# Altium PCB PCB_Reflow_Plate.PcbDoc (part 1 of 2)
Units mil, origin at the board's own origin, x right, y up, seen from the top; angles counter-clockwise.
Board outline 3822.83 x 3712.6 mil, 2 copper layers (Top Layer, Bottom Layer); 42 components, 17 nets, 157 pads, 47 vias.
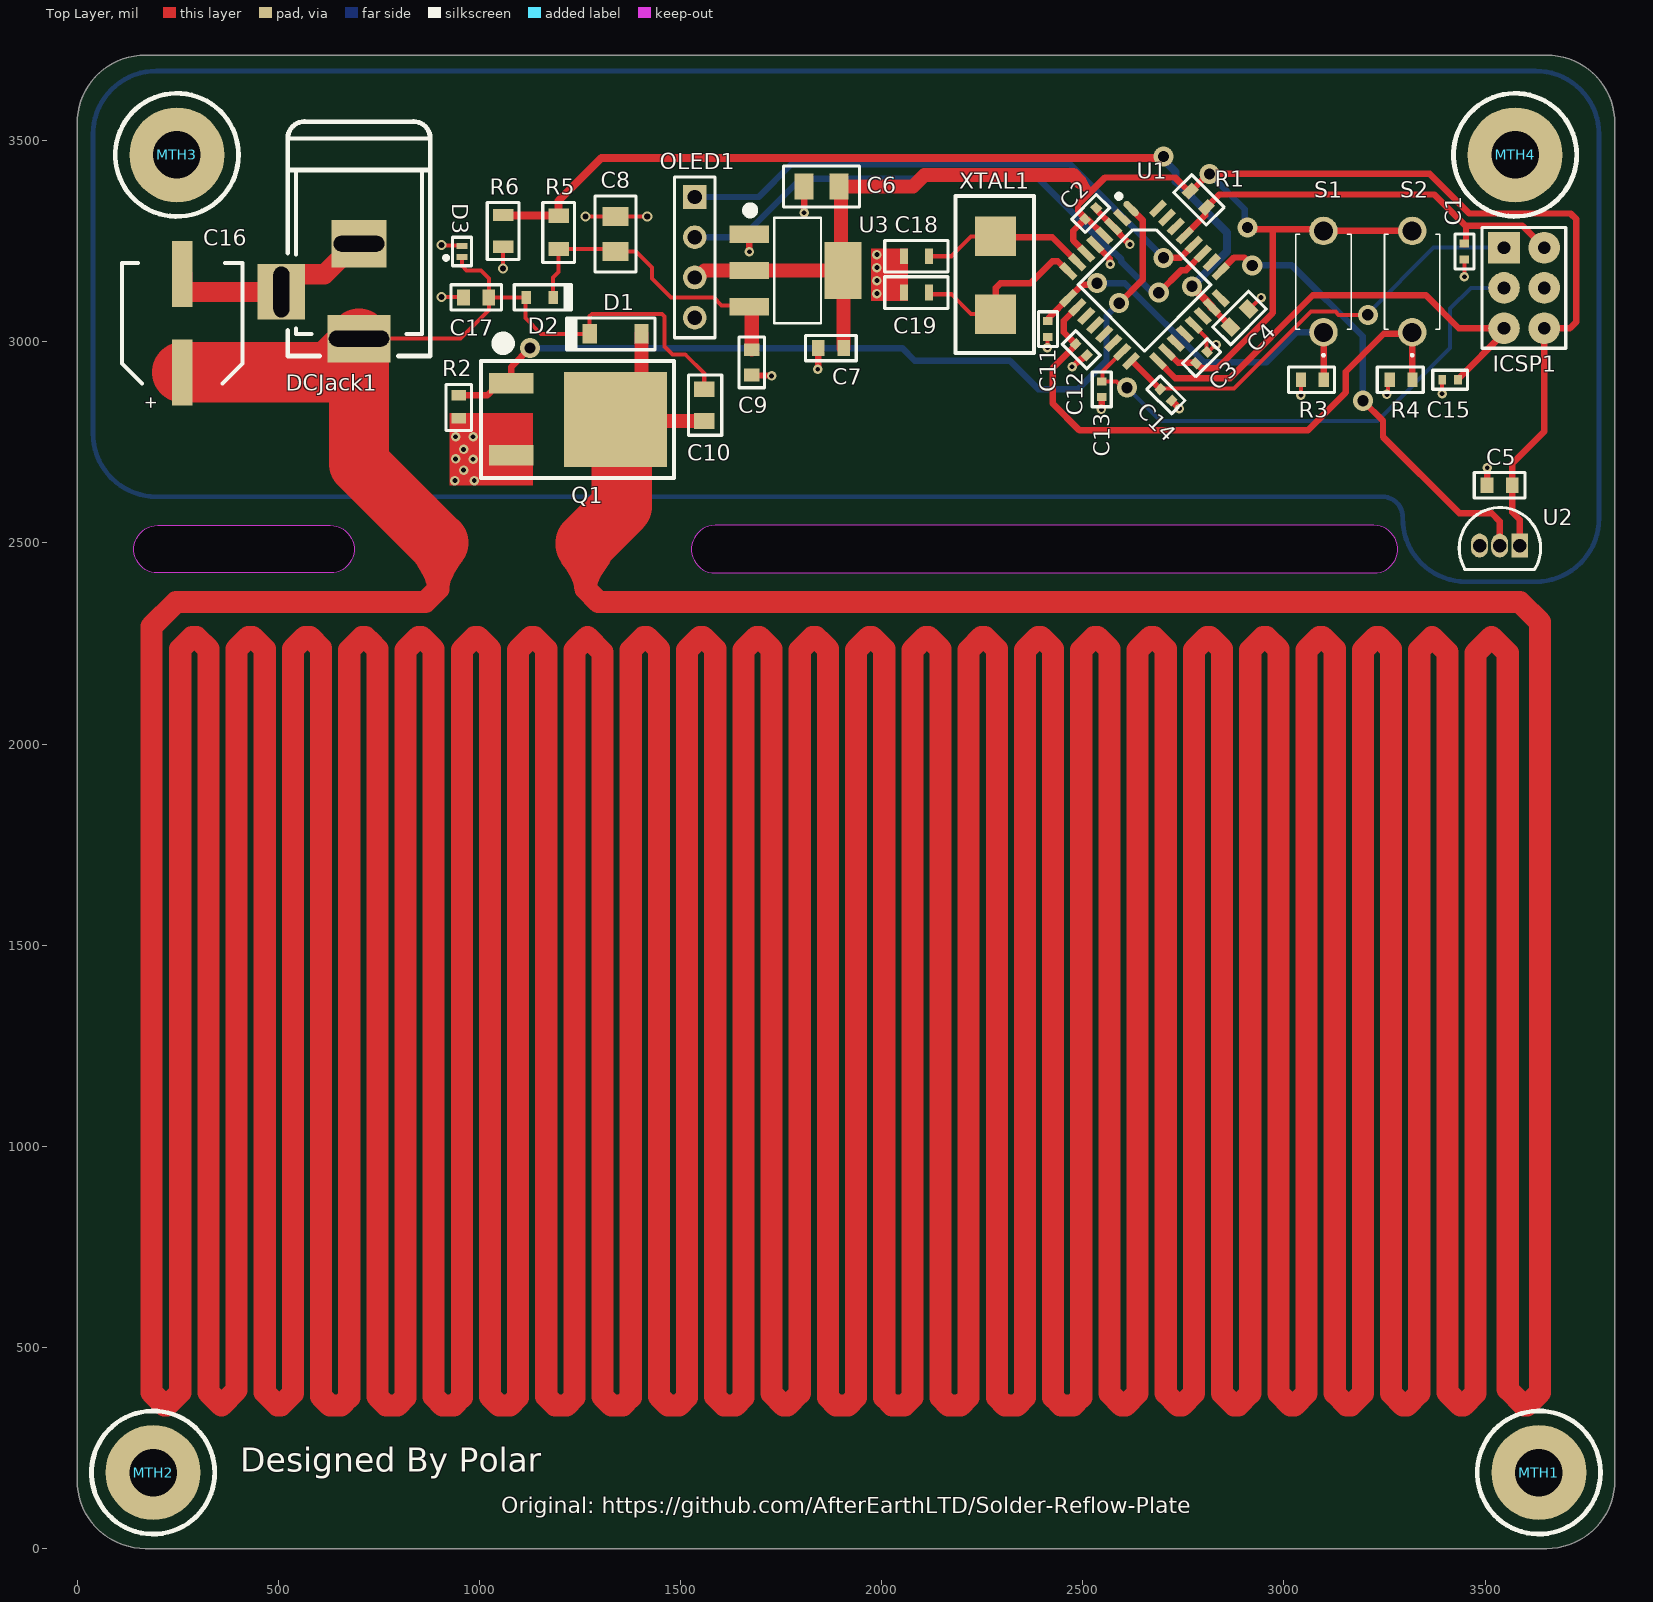
[diagram p0: Top Layer view]
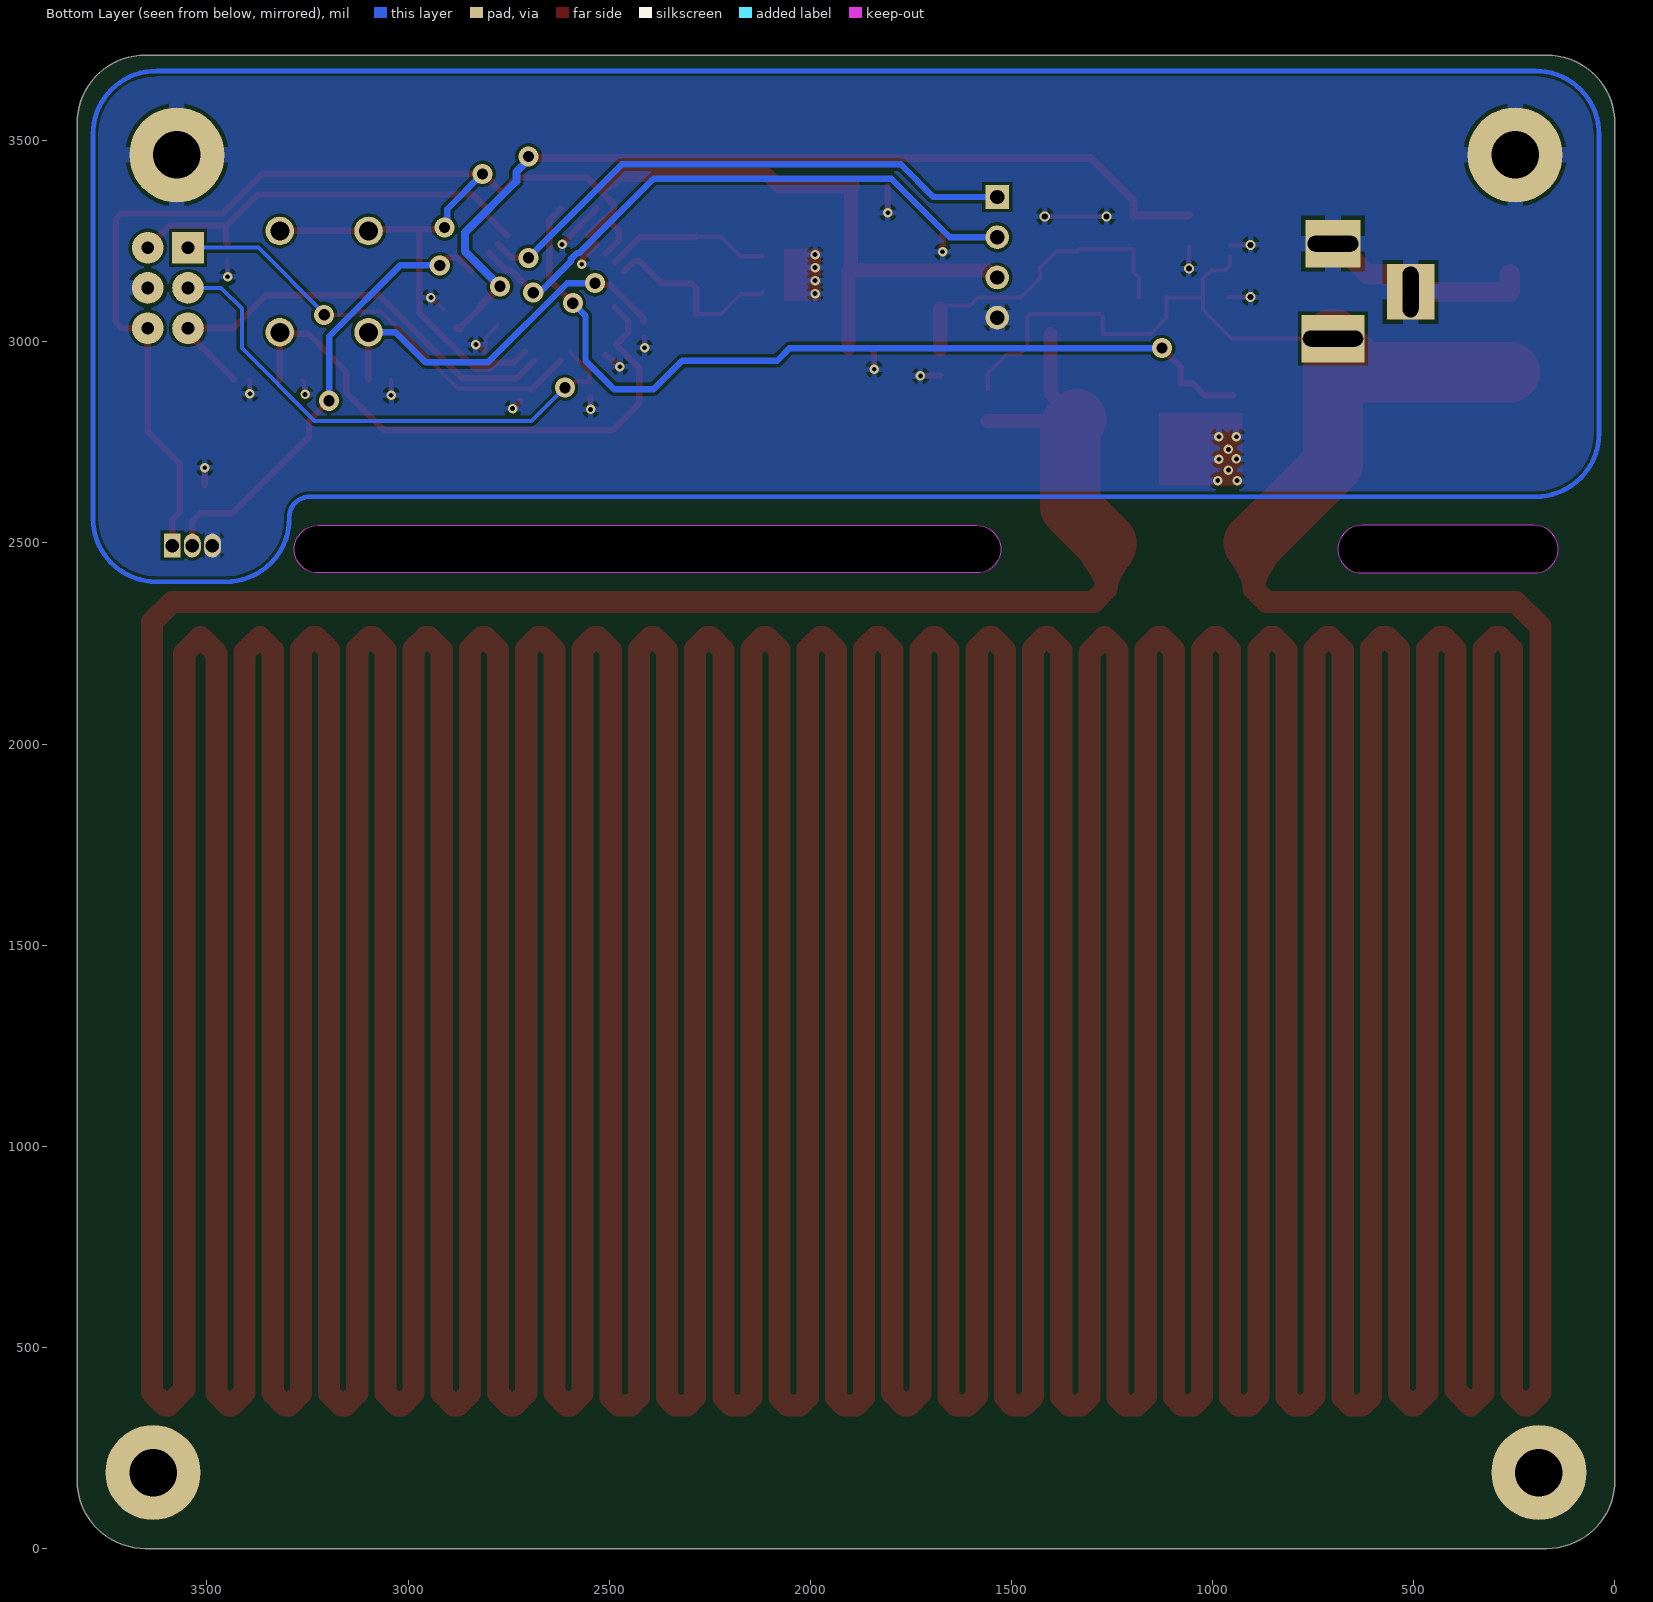
[diagram p1: Bottom Layer view, seen from below]
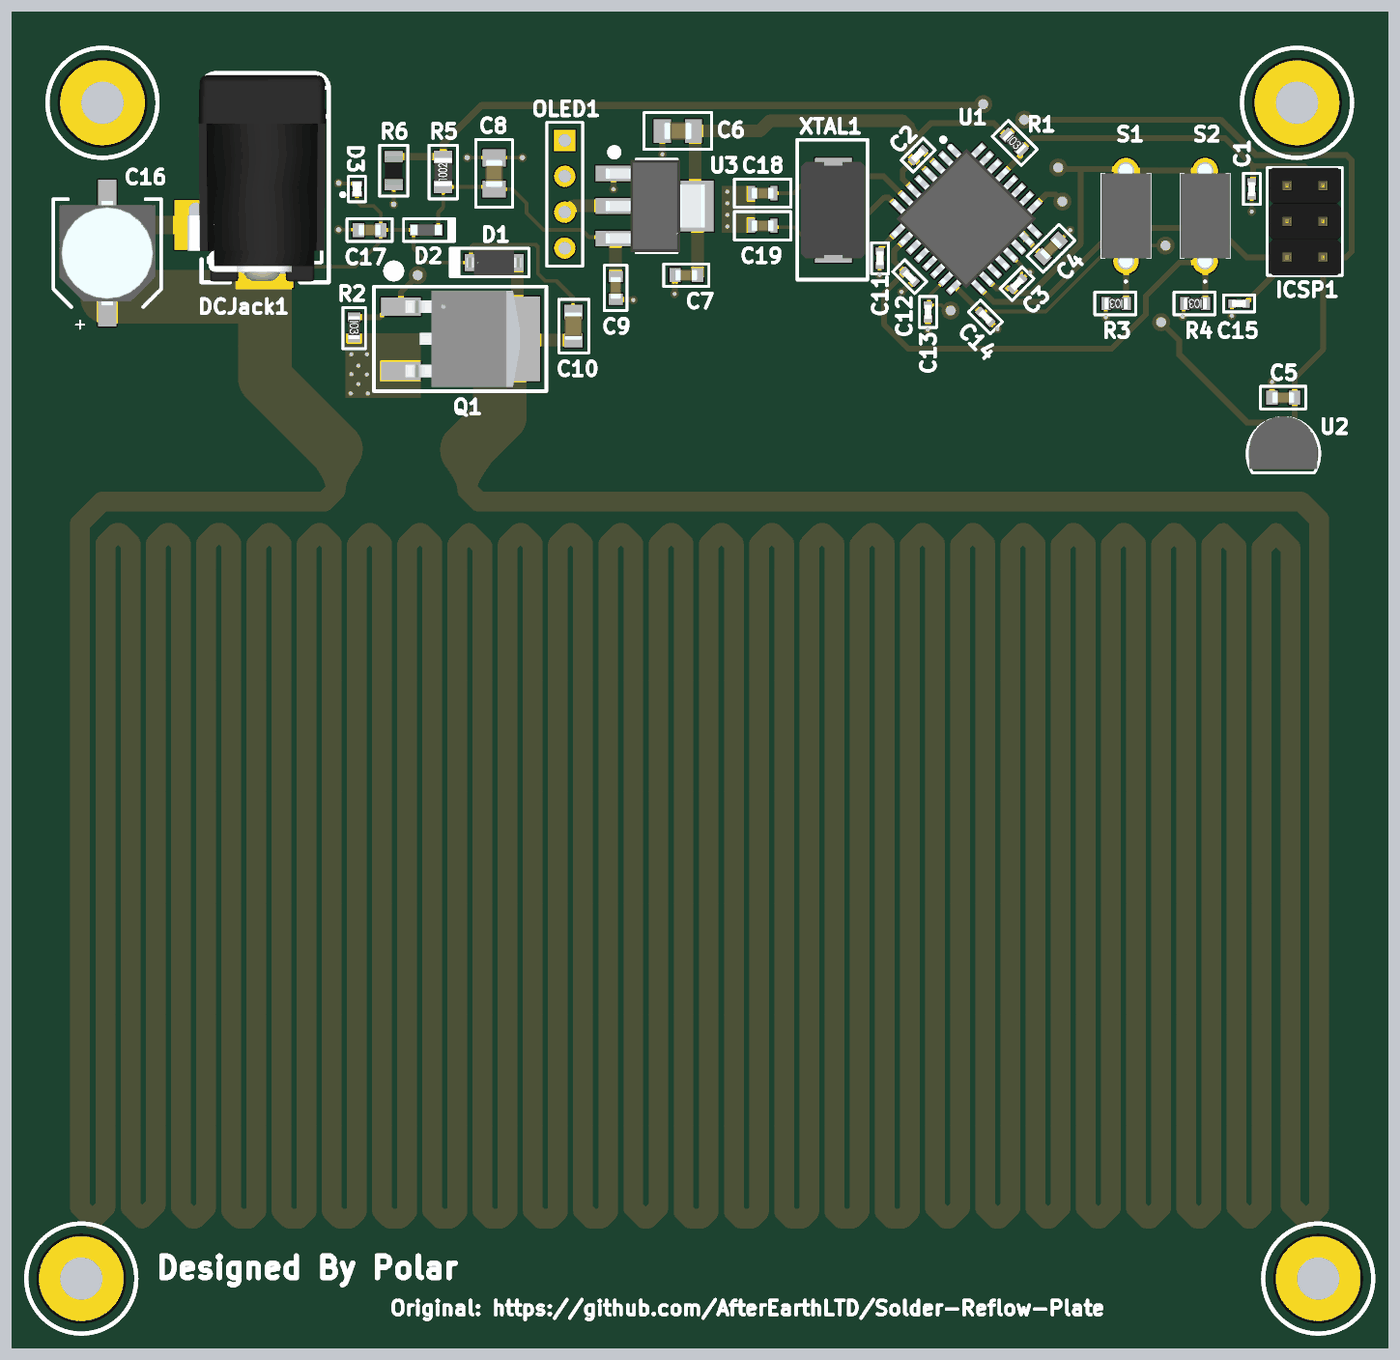
[diagram p2: 3D render of the assembled board from above, using the file's embedded part models]

## Layer stack, top to bottom
Top Solder: solder mask 0.4, Solder Resist, Dk 3.5
Top Layer: signal copper 1.4
Dielectric 1: dielectric 12.6, FR-4, Dk 4.8
Bottom Layer: signal copper 1.4
Bottom Solder: solder mask 0.4, Solder Resist, Dk 3.5

## Board outline
0,169.29 0,3543.31 cw(c169.29,3543.31) 169.29,3712.6 3653.54,3712.6 cw(c3653.54,3543.31) 3822.83,3543.31 3822.83,169.29 cw(c3653.54,169.29) 3653.54,0 169.29,0 cw(c169.29,169.29)
cut-out: 1586.14,2425.2 3223.93,2425.2 ccw(c3223.93,2484.25) 3223.93,2543.31 1586.14,2543.31 ccw(c1586.14,2484.25)
cut-out: 200.31,2425.2 cw(c200.31,2484.25) 200.31,2543.31 629.44,2543.31 cw(c629.44,2484.25) 629.44,2425.2

## Design rules (kind name [scope] priority, off if disabled: settings)
Clearance [All] p1: gap=7.5 ignorepadtopadclearanceinfootprint=FALSE except(8: Track-SMDPad Track-Via)
HoleSize [All] p1: absolutevalues=TRUE maxlimit=150 minlimit=1 maxpercent=80.000 minpercent=20.000
HoleToHoleClearance [All] p1: gap=16 allowstackedmicrovias=TRUE
MinimumSolderMaskSliver [All] p1: minsoldermaskwidth=3.5
PolygonConnect [All] p1: thpad.connectstyle=Relief thpad.reliefconductorwidth=40 thpad.reliefentries=4 thpad.polygonreliefangle="90 Angle" thpad.airgapwidth=10 smdpad.connectstyle=Relief smdpad.reliefconductorwidth=15 smdpad.reliefentries=4 smdpad.polygonreliefangle="90 Angle" smdpad.airgapwidth=10 via.connectstyle=Relief via.reliefconductorwidth=15 via.reliefentries=4 via.polygonreliefangle="90 Angle" via.airgapwidth=10
RoutingVias [All] p1: holewidth=15 width=30 viastyle="Through Hole" minholewidth=10 minwidth=20 maxholewidth=28 maxwidth=50
SilkToSilkClearance [All] p1: silktosilkclearance=8
SilkToSolderMaskClearance [IsPad] p1: minsilkscreentomaskgap=5.5 clearancetoexposedcopper=TRUE
SolderMaskExpansion [All] p1: expansion=4 istentingtop=FALSE
Width [All] p1: maxlimit=150 minlimit=10 preferedwidth=20
25 further rules are at their usual default settings.

## Components (designator, comment, footprint, x,y, rotation, side; value= is the part's Value field where it differs from the comment)
C1 "10n 0402" 0402B103J500CT 3448.82,3224.41 r90 top
C2 "10n 0402" 0402B103J500CT 2519.68,3318.9 r225 top
C3 "10n 0402" 0402B103J500CT 2795.28,2960.63 r45 top
C4 "100n 0603" 0603B104K250CT 2889.76,3059.05 r45 top
C5 "100n 0603" 0603B104K250CT 3536.38,2643.39 r180 top
C6 "22u 0805" CL21A226MAYNNNE 1850.39,3385.83 r180 top
C7 "100n 0603" 0603B104K250CT 1874.02,2984.25 r0 top
C8 "22u 0805" CL21A226MAYNNNE 1338.58,3267.72 r90 top
C9 "100n 0603" 0603B104K250CT 1677.17,2948.82 r90 top
C10 "1n 0805" FM21X102K501PXG 1559.06,2842.52 r90 top
C11 "10n 0402" 0402B103J500CT 2413.39,3031.5 r90 top
C12 "10n 0402" 0402B103J500CT 2496.06,2980.31 r135 top
C13 "10n 0402" 0402B103J500CT 2547.24,2881.89 r270 top
C14 "10n 0402" 0402B103J500CT 2706.83,2867.97 r135 top
C15 "10n 0402" 0402B103J500CT 3413.39,2905.51 r0 top
C16 "100u SMD Polarized" UWT1V101MCL1GS 261.28,3045.91 r90 top
C17 "100n 0603" 0603B104K250CT 992.13,3110.24 r0 top
C18 "16pf 0603 Capacitor" NMC0603NPO160J50TRPF 2086.61,3212.6 r0 top
C19 "16pf 0603 Capacitor" NMC0603NPO160J50TRPF 2086.61,3122.05 r0 top
D1 "Zener Diode" MMSZ24T1G 1338.58,3019.68 r180 top
D2 "Diode" 1N4448X-TP 1149.61,3110.24 r0 top
D3 "TVS bi-directional" PESD18VF1BLYL 956.69,3224.41 r90 top
DCJack1 "DCJack" KLDX-0202-B 677.08,3241.85 r270 top
ICSP1 "SL 22 112 06 G" "SL 22 112 06 G" 3547.24,3233.86 r0 top
MTH1 "Mounting Hole 6mm outer 3mm inner" MTH_6mmOD_3mmID 3633.86,188.98 r0 top
MTH2 "Mounting Hole 6mm outer 3mm inner" MTH_6mmOD_3mmID 188.98,188.98 r0 top
MTH3 "Mounting Hole 6mm outer 3mm inner" MTH_6mmOD_3mmID 248.03,3464.57 r0 top
MTH4 "Mounting Hole 6mm outer 3mm inner" MTH_6mmOD_3mmID 3574.8,3464.57 r0 top
OLED1 "Header 4" HDR1X4 1535.43,3359.84 r270 top
Q1 "Mosfet DPAK" AOD442 1208.66,2807.09 r270 top
R1 "10k 0603" RTT03103JTP 2787.4,3354.33 r135 top
R2 "10k 0603" RTT03103JTP 948.82,2838.58 r90 top
R3 "10k 0603" RTT03103JTP 3070.87,2905.51 r0 top
R4 "10k 0603" RTT03103JTP 3291.34,2905.51 r0 top
R5 "3k 0805" RTT05302JTP 1196.85,3271.65 r270 top
R6 "1k 0805" CR0805-FX-1001ELF 1059.06,3275.59 r90 top
S1 "PTS636_SP50_LFS" PTS636_SP50_LFS 3098.42,3023.62 r90 top
S2 "PTS636_SP50_LFS" PTS636_SP50_LFS 3318.9,3023.62 r90 top
U1 "ATMEGA328P-AU" ATMEGA328P-AU 2653.54,3141.73 r315 top
U2 "LMT85LP" LMT85LP 3536.38,2493.39 r0 top
U3 "AMS1117-5.0" AMS1117-5.0 1787.4,3177.17 r270 top
XTAL1 "16MHz Crystal" ABM7-16.000MHZ-D2Y-T 2283.46,3165.35 r270 top

## Footprints (in the part's own frame and the unit in brackets; to place one, negate y for a bottom-side part, rotate by r counter-clockwise, add the part's x,y. Pads: shape width x height; smd on the part's side, far side on the other; paste and mask are expansions set on the pad)
1N4448X-TP [mm]
  rect 0.6x0.8 smd: A(-0.85,0) K(0.85,0)
  silkscreen extent -1.6,-0.8 2,0.8, body extent -1.09,-0.4 1.09,0.4, height 0.76
0402B103J500CT [mm]
  rect 0.5x0.6 smd: 1(-0.5,0) 2(0.5,0)
  silkscreen extent -1.1,-0.6 1.1,0.6, body extent -0.5,-0.25 0.5,0.25, height 0.51
0603B104K250CT [mm]
  rect 0.8x1 smd: 1(-0.8,0) 2(0.8,0)
  silkscreen extent -1.6,-0.8 1.6,0.8, body extent -0.8,-0.4 0.8,0.4, height 0.87
ABM7-16.000MHZ-D2Y-T [mm]
  rect 2.5x2.6 smd: 1(-2.45,0) 2(2.45,0)
  silkscreen extent -4.99,-2.54 4.92,2.41, body extent -3.41,-2.29 3.41,2.29, height 1.41
AMS1117-5.0 [mm] "1A 70dB@(120Hz) 5mA 1.4V@1A -40?~+125?@(Tj) Fixed 5V~5V Positive 0.003%Vout 1 20V High-current SOT-223-3 Linear Voltage Regulators (LDO) ROHS"
  rect 1.1x2.5 smd: 1(-2.3,-2.97) 2(0,-2.97) 3(2.3,-2.97)
  rect 1.1x2.5 on Mech2: 1(-2.3,-2.97) 2(0,-2.97) 3(2.3,-2.97)
  rect 3.6x2.34 smd: 4(0,2.97)
  rect 3.6x2.34 on Mech2: 4(0,2.97)
  silkscreen extent -3.93,-3.03 3.33,1.57, body extent -3.25,-3.5 3.25,3.5, height 1.8
AOD442 [mm]
  rect 6x6.5 smd: 1(0,3.292)
  rect 1.3x2.8 smd: 2(2.273,-3.292) 3(-2.273,-3.292)
  silkscreen extent -5.16,-5.2 3.7,7, body extent -3.4,-2.97 3.4,5.11, height 2.45
ATMEGA328P-AU [mm]
  oval 1.2x0.45 smd: 1(-4,2.8)
  oval 1x0.45 on Mech2: 1(-4,2.8)
  rect 1.2x0.45 smd: 2(-4,2) 3(-4,1.2) 4(-4,0.4) 5(-4,-0.4) 6(-4,-1.2) 7(-4,-2) 8(-4,-2.8) 17(4,-2.8) 18(4,-2) 19(4,-1.2) 20(4,-0.4) 21(4,0.4) 22(4,1.2) 23(4,2) 24(4,2.8)
  rect 1x0.45 on Mech2: 2(-4,2) 3(-4,1.2) 4(-4,0.4) 5(-4,-0.4) 6(-4,-1.2) 7(-4,-2) 8(-4,-2.8) 17(4,-2.8) 18(4,-2) 19(4,-1.2) 20(4,-0.4) 21(4,0.4) 22(4,1.2) 23(4,2) 24(4,2.8)
  rect 0.45x1.2 smd: 9(-2.8,-4) 10(-2,-4) 11(-1.2,-4) 12(-0.4,-4) 13(0.4,-4) 14(1.2,-4) 15(2,-4) 16(2.8,-4) 25(2.8,4) 26(2,4) 27(1.2,4) 28(0.4,4) 29(-0.4,4) 30(-1.2,4) 31(-2,4) 32(-2.8,4)
  rect 0.45x1 on Mech2: 9(-2.8,-4) 10(-2,-4) 11(-1.2,-4) 12(-0.4,-4) 13(0.4,-4) 14(1.2,-4) 15(2,-4) 16(2.8,-4) 25(2.8,4) 26(2,4) 27(1.2,4) 28(0.4,4) 29(-0.4,4) 30(-1.2,4) 31(-2,4) 32(-2.8,4)
  silkscreen extent -5.24,-2.97 2.97,2.97, body extent -4.5,-4.5 4.5,4.5, height 1.2
CL21A226MAYNNNE [mm]
  rect 1.2x1.65 smd: 1(-1.1,0) 2(1.1,0)
  silkscreen extent -2.4,-1.3 2.4,1.3, body extent -1,-0.63 1,0.63, height 1.45
CR0805-FX-1001ELF [mm]
  rect 0.762x1.3 smd: 1(-1,0) 2(1,0)
  silkscreen extent -1.8,-1 1.8,1, body extent -1,-0.63 1,0.63, height 0.51
FM21X102K501PXG [mm]
  rect 1x1.3 smd: 1(-1,0) 2(1,0)
  silkscreen extent -1.9,-1.1 1.9,1, body extent -1,-0.63 1,0.63, height 1
HDR1X4 [mm] "Connector; Header; 4 Position"
  rect 1.5x1.5 hole 0.9: 1(0,0)
  round 1.5 hole 0.9: 2(2.54,0) 3(5.08,0) 4(7.62,0)
  silkscreen extent -1.27,-1.27 8.89,1.27
KLDX-0202-B [mm]
  rect 3x4 hole 1 slot 3.8 at 90 deg: P1(5.943,0.602)
  rect 3x3.5 hole 1 slot 3.2 at 90 deg: P2(-0.051,0.602)
  rect 3.5x3 hole 1 slot 3.2 at 0 deg: P3(2.997,-4.3)
  silkscreen extent -7.76,-3.9 7.04,5.1, body extent -7.62,-4.89 7,4.88, height 10.67
LMT85LP [mm]
  rect 1.07x1.5 hole 0.85 mask+0.003: 1(1.27,0)
  oval 1.07x1.5 hole 0.85 mask+0.003: 2(0,0) 3(-1.27,0)
  silkscreen extent -2.55,-1.52 2.59,2.4, body extent -2.41,-1.24 2.41,2.5, height 5.44
MMSZ24T1G [mm]
  rect 0.91x1.22 smd: A(-1.635,0) K(1.635,0)
  silkscreen extent -2.48,-1 3.1,1, body extent -1.93,-0.9 1.93,0.9, height 1.35
MTH_6mmOD_3mmID [mm] "mounting hole 6mm outer 3mm inner"
  round 6 hole 3 mask+0.178: 1(0,0)
  silkscreen extent -3.89,-3.89 3.89,3.89
NMC0603NPO160J50TRPF [mm]
  rect 0.5x1 smd: 1(-0.8,0) 2(0.8,0)
  silkscreen extent -2,-1 2,1, body extent -0.8,-0.4 0.8,0.4, height 0.87
PESD18VF1BLYL [mm]
  rect 0.4x0.7 smd: 1(-0.35,0) 2(0.35,0)
  silkscreen extent -0.9,-0.6 0.9,1.1, body extent -0.5,-0.3 0.5,0.3, height 0.48
PTS636_SP50_LFS [mm] "Switch"
  round 1.8 hole 1.2: 1(0,0) 2(6.4,0)
  silkscreen extent -1.5,-1.75 6.2,1.75, body extent -0.5,-1.75 6.9,1.75, height 4.6
RTT03103JTP [mm]
  rect 0.65x0.9 smd: 1(-0.725,0) 2(0.725,0)
  silkscreen extent -1.5,-0.8 1.4,0.8, body extent -0.8,-0.4 0.8,0.4, height 0.46
RTT05302JTP [mm]
  rect 0.9x1.3 smd: 1(-1.05,0) 2(1.05,0)
  silkscreen extent -1.9,-1 1.9,1, body extent -1,-0.63 1,0.63, height 0.51
"SL 22 112 06 G" [mm]
  rect 2x2 hole 0.8: 1(0,0)
  round 2 hole 0.8: 2(0,-2.54) 3(0,-5.08) 4(2.54,-5.08) 5(2.54,-2.54) 6(2.54,0)
  silkscreen extent -1.4,-6.35 3.9,1.27, body extent -1.27,-6.35 3.81,1.27, height 8.65
UWT1V101MCL1GS [mil]
  rect 164x50 smd: 1(-122,0) 2(122,0)
  silkscreen extent -150,-150 150,150, body extent -146,-134 146,134, height 315

## Part data
C1 C2 C3 C11 C12 C13 C14 C15: library part C1005X7S2A103M050BB, "Cap Ceramic 0.01uF 100V X7S 20% SMD 0402 125C Paper T/R", Capacitance=10nF, Case Code (Imperial)=0402, Case Code (Metric)=1005, Dielectric=X7S, Manufacturer=TDK, Max Operating Temperature=125°C, Min Operating Temperature=-55°C, Package Quantity=1, Resistor Type=Ceramic, Tolerance=20%, Voltage Rating=100V, Case/Package=0402, Category="Ceramic Capacitors", ComponentLink1Description=https://datasheet.ciiva.com/24217/c1005x7s2a103m050bb-264489-24217683.pdf?src-supplier=Mouser, ComponentLink1URL=https://datasheet.ciiva.com/24217/c1005x7s2a103m050bb-264489-24217683.pdf?src-supplier=Mouser, Depth=0.5mm, Lead Free="Lead Free", Length=1mm, Manufacturer Part Number=C1005X7S2A103M050BB, Mount="Surface Mount", Number of Pins=2, Packaging="Tape and Reel", Pricing 1="1=0.15740, 10=0.11320, 25=0.08760, 50=0.06570, 100=0.05460, 250=0.05380, 500=0.03850, 1000=0.03230, 3000=0.02830, 6000=0.02780 (USD)", RoHS=Yes, RoHS Compliant=Yes, Series=C, Stock 1=12146, Supplier 1="Arrow Electronics", Supplier Part Number 1=C1005X7S2A103M050BB, Termination=SMD/SMT, Thickness=0.022inch, Voltage Rating (DC)=100V, Weight=2.3E-05oz, Width=0.5mm
C4 C5 C7 C9 C17: library part GRM188R72A104KA35D, "CAP CER 0.1UF 100V X7R 0603", Capacitance=100nF, Case Code (Imperial)=0603, Case Code (Metric)=1608, Dielectric=X7R, Manufacturer=Murata, Max Operating Temperature=125°C, Min Operating Temperature=-55°C, Package Quantity=1, Tolerance=10%, Voltage=100V, Case/Package=0603, Category="Ceramic Capacitors", ComponentLink1Description=https://datasheet.ciiva.com/22703/1747473-22703345.pdf?src-supplier=Element14, ComponentLink1URL=https://datasheet.ciiva.com/22703/1747473-22703345.pdf?src-supplier=Element14, ComponentLink2Description=https://datasheet.ciiva.com/34302/1857815-34302863.pdf?src-supplier=Jameco, ComponentLink2URL=https://datasheet.ciiva.com/34302/1857815-34302863.pdf?src-supplier=Jameco, ComponentLink3Description=https://datasheet.ciiva.com/11787/0900766b80ef921d-11787064.pdf?src-supplier=RSComponents, ComponentLink3URL=https://datasheet.ciiva.com/11787/0900766b80ef921d-11787064.pdf?src-supplier=RSComponents, ComponentLink4Description=https://datasheet.ciiva.com/18100/getdatasheetpartid-27818-18100710.pdf?src-supplier=Verical, ComponentLink4URL=https://datasheet.ciiva.com/18100/getdatasheetpartid-27818-18100710.pdf?src-supplier=Verical, ComponentLink5Description=https://datasheet.ciiva.com/29201/451984-da-01-en-vs-kondensator-0603-29201725.pdf?src-supplier=Conrad, ComponentLink5URL=https://datasheet.ciiva.com/29201/451984-da-01-en-vs-kondensator-0603-29201725.pdf?src-supplier=Conrad, ComponentLink6Description=https://datasheet.ciiva.com/7937/1747473-7937676.pdf?src-supplier=Element14, ComponentLink6URL=https://datasheet.ciiva.com/7937/1747473-7937676.pdf?src-supplier=Element14, ComponentLink7Description=https://datasheet.ciiva.com/135/partnumbering-e-01-135140.pdf?src-supplier=Digi-Key, ComponentLink7URL=https://datasheet.ciiva.com/135/partnumbering-e-01-135140.pdf?src-supplier=Digi-Key, ComponentLink8Description=https://datasheet.ciiva.com/135/partnumbering-e-01-135139.pdf?src-supplier=Digi-Key, ComponentLink8URL=https://datasheet.ciiva.com/135/partnumbering-e-01-135139.pdf?src-supplier=Digi-Key, ComponentLink9Description=https://datasheet.ciiva.com/135/partnumbering-e-01-135141.pdf?src-supplier=Digi-Key, ComponentLink9URL=https://datasheet.ciiva.com/135/partnumbering-e-01-135141.pdf?src-supplier=Digi-Key, ComponentLink10Description=https://datasheet.ciiva.com/16382/product-16382965.pdf?src-supplier=Future+Electronics, ComponentLink10URL=https://datasheet.ciiva.com/16382/product-16382965.pdf?src-supplier=Future+Electronics, Construction=Flat, Depth=0.8mm, Height=0.8mm, Lead Free="Lead Free", Length=1.6mm, Manufacturer Part Number=GRM188R72A104KA35D, Material=Ceramic, Mount="Surface Mount", Packaging="Tape and Reel", Pricing 1="4000=0.04400 (USD)", Radiation Hardening=No, REACH SVHC="No SVHC", RoHS=Yes, RoHS Compliant=Yes, Series=GRM, Size=0.8mm, Stock 1=360000, Supplier 1="Arrow Electronics", Supplier Part Number 1=GRM188R72A104KA35D, Termination=SMD/SMT, Thickness=0.035inch, Voltage Rating=100V, Voltage Rating (DC)=100V, Weight=0.000222oz, Width=0.8mm
C6 C8: library part CL21A226MAYNNNE, "25V 22uF X5R ±20% 0805 Multilayer Ceramic Capacitors MLCC - SMD/SMT ROHS", Capacitance=22u, Manufacturer=Samsung, Supplier Part Number 1=C602037, Category="Ceramic Capacitors", Manufacturer Part Number=CL21A226MAYNNNE, Pricing 1="20=0.01460, 200=0.01420, 600=0.01420, 2000=0.01420, 10000=0.01420, 20000=0.01420 (USD)", RoHS=Yes, RoHS Compliant=Yes, Stock 1=9380620, Supplier 1=LCSC
C10: library part GRM21AR72E102KW01D, "0805 1 nF 250 V ±10% Tolerance X7R SMT Multilayer Ceramic Capacitor", Capacitance=1n, Case Code (Imperial)=0805, Case Code (Metric)=2012, Dielectric=X7R, Manufacturer=Murata, Max Operating Temperature=125°C, Min Operating Temperature=-55°C, Package Quantity=4000, Tolerance=10%, Voltage=250V, Case/Package=0805, Category="Ceramic Capacitors", ComponentLink1Description=https://datasheet.ciiva.com/3778/12716grm21ar72e102kw0123-3778089.pdf?src-supplier=Arrow+Electronics, ComponentLink1URL=https://datasheet.ciiva.com/3778/12716grm21ar72e102kw0123-3778089.pdf?src-supplier=Arrow+Electronics, ComponentLink2Description=https://datasheet.ciiva.com/134/partnumbering-e-01-134212.pdf?src-supplier=Digi-Key, ComponentLink2URL=https://datasheet.ciiva.com/134/partnumbering-e-01-134212.pdf?src-supplier=Digi-Key, ComponentLink3Description=https://datasheet.ciiva.com/134/partnumbering-e-01-134213.pdf?src-supplier=Digi-Key, ComponentLink3URL=https://datasheet.ciiva.com/134/partnumbering-e-01-134213.pdf?src-supplier=Digi-Key, ComponentLink4Description=https://datasheet.ciiva.com/134/partnumbering-e-01-134214.pdf?src-supplier=Digi-Key, ComponentLink4URL=https://datasheet.ciiva.com/134/partnumbering-e-01-134214.pdf?src-supplier=Digi-Key, Construction=Flat, Depth=1.25mm, Height=1mm, Lead Free="Lead Free", Length=2mm, Manufacturer Part Number=GRM21AR72E102KW01D, Material=Ceramic, Mount="Surface Mount", Packaging="Tape and Reel", Pricing 1="4000=0.07440, 8000=0.06810, 12000=0.06640, 28000=0.06360, 100000=0.05520 (USD)", Radiation Hardening=No, RoHS=Yes, RoHS Compliant=Yes, Series=GRM, Stock 1=28000, Supplier 1="Arrow Electronics", Supplier Part Number 1=GRM21AR72E102KW01D, Termination=SMD/SMT, Thickness=0.039inch, Voltage Rating=250V, Voltage Rating (DC)=250V, Width=1.25mm
C16: library part UWT1V101MCL1GS, "-45℃~+105℃ 1000hrs@105℃ 100uF 7.7mm 35V 6.3mm ±20% SMD,D6.3xL7.7mm Aluminum Electrolytic Capacitors - SMD ROHS", Capacitance=100uF, Case/Package=Radial, Dielectric Material=Aluminium, Leakage Current=3uA, Manufacturer=Nichicon, Max Operating Temperature=105°C, Min Operating Temperature=-55°C, Package Quantity=900, Ripple Current=84mA, Supplier Part Number 1=C125975, Tolerance=20%, Voltage=35V, Category="Aluminum Electrolytic Capacitors", ComponentLink1Description=https://datasheet.ciiva.com/96/e-wt-96660.pdf?src-supplier=Digi-Key, ComponentLink1URL=https://datasheet.ciiva.com/96/e-wt-96660.pdf?src-supplier=Digi-Key, ComponentLink2Description=https://datasheet.ciiva.com/96/e-wt-96659.pdf?src-supplier=Digi-Key, ComponentLink2URL=https://datasheet.ciiva.com/96/e-wt-96659.pdf?src-supplier=Digi-Key, ComponentLink3Description=https://datasheet.ciiva.com/96/e-wt-96661.pdf?src-supplier=Digi-Key, ComponentLink3URL=https://datasheet.ciiva.com/96/e-wt-96661.pdf?src-supplier=Digi-Key, ComponentLink4Description=https://datasheet.ciiva.com/11778/0900766b80fa3a91-11778473.pdf?src-supplier=RSComponents, ComponentLink4URL=https://datasheet.ciiva.com/11778/0900766b80fa3a91-11778473.pdf?src-supplier=RSComponents, ComponentLink5Description=https://datasheet.ciiva.com/11687/e-wt-11687372.pdf?src-supplier=Avnet, ComponentLink5URL=https://datasheet.ciiva.com/11687/e-wt-11687372.pdf?src-supplier=Avnet, ComponentLink6Description=https://datasheet.ciiva.com/16294/e-wt-16294316.pdf?src-supplier=Future+Electronics, ComponentLink6URL=https://datasheet.ciiva.com/16294/e-wt-16294316.pdf?src-supplier=Future+Electronics, ComponentLink7Description=https://datasheet.ciiva.com/15199/getdatasheetpartid-450031-15199274.pdf?src-supplier=Verical, ComponentLink7URL=https://datasheet.ciiva.com/15199/getdatasheetpartid-450031-15199274.pdf?src-supplier=Verical, Construction=Cylindrical, Diameter=6.3mm, Dissipation Factor=0.14%, Height=7.7mm, Height - Seated (Max)=0.303inch, Lead Diameter=0.8mm, Lead Free="Lead Free", Lead Pitch=2.2mm, Length=7.7mm, Life (Hours)=1000Hour, Manufacturer Part Number=UWT1V101MCL1GS, Mount="Surface Mount,PCB", Number of Pins=2, Packaging="Tape and Reel", Pricing 1="5=0.08560, 50=0.06960, 150=0.06140, 500=0.05460, 2500=0.05220, 5000=0.05060 (USD)", Radiation Hardening=No, REACH SVHC="No SVHC", Ripple Current (AC)=84mA, RoHS=Yes, RoHS Compliant=Yes, Series=WT, Stock 1=986890, Supplier 1=LCSC, Termination=SMD/SMT, Voltage Rating=35V, Voltage Rating (DC)=35V
C18 C19: library part NMC0603NPO160J50TRPF, "Cap Ceramic 16pF 50V C0G 5% SMD 0603 125°C Paper T/R", Capacitance=16pF, Case/Package=0603, Dielectric=C0G, Manufacturer="NIC Components", Max Operating Temperature=125°C, Min Operating Temperature=-55°C, Tolerance=5%, Category="Ceramic Capacitors", ComponentLink1Description=https://datasheet.ciiva.com/11602/nmc1-11602959.pdf?src-supplier=Avnet, ComponentLink1URL=https://datasheet.ciiva.com/11602/nmc1-11602959.pdf?src-supplier=Avnet, Construction=Flat, Depth=0.8mm, Length=1.6mm, Manufacturer Part Number=NMC0603NPO160J50TRPF, Mount="Surface Mount", Packaging="Tape and Reel", Pricing 1="1=0.00630, 10=0.00560, 25=0.00470 (USD)", Radiation Hardening=No, RoHS=Yes, RoHS Compliant=Yes, Stock 1=3200, Supplier 1="Arrow Electronics", Supplier Part Number 1=NMC0603NPO160J50TRPF
D1: library part MMSZ24T1G, "Zener Single Diode, 24 V, 500 mW, SOD-123, 5 %, 2, 150 C RoHS Compliant: Yes", Case/Package=SOD-123-2, Forward Voltage=900mV, Manufacturer="ON Semiconductor", Max Operating Temperature=150°C, Max Power Dissipation=500mW, Max Reverse Current=50nA, Min Operating Temperature=-55°C, Package Quantity=1, Test Current=5mA, Tolerance=5%, Voltage Rating (DC)=24V, Zener Current=10mA, Category="Zener Diodes", ComponentLink1Description=https://datasheet.ciiva.com/15142/getdatasheetpartid-53226-15142109.pdf?src-supplier=Verical, ComponentLink1URL=https://datasheet.ciiva.com/15142/getdatasheetpartid-53226-15142109.pdf?src-supplier=Verical, ComponentLink2Description=https://datasheet.ciiva.com/895/mmsz2v4t1-d-895073.pdf?src-supplier=Digi-Key, ComponentLink2URL=https://datasheet.ciiva.com/895/mmsz2v4t1-d-895073.pdf?src-supplier=Digi-Key, ComponentLink3Description=https://datasheet.ciiva.com/895/mmsz2v4t1-d-895074.pdf?src-supplier=Digi-Key, ComponentLink3URL=https://datasheet.ciiva.com/895/mmsz2v4t1-d-895074.pdf?src-supplier=Digi-Key, ComponentLink4Description=https://datasheet.ciiva.com/895/mmsz2v4t1-d-895075.pdf?src-supplier=Digi-Key, ComponentLink4URL=https://datasheet.ciiva.com/895/mmsz2v4t1-d-895075.pdf?src-supplier=Digi-Key, ComponentLink5Description=https://datasheet.ciiva.com/16396/mmsz2v4t1-d-16396045.pdf?src-supplier=Future+Electronics, ComponentLink5URL=https://datasheet.ciiva.com/16396/mmsz2v4t1-d-16396045.pdf?src-supplier=Future+Electronics, Contact Plating=Tin,Matte, Element Configuration=Single, ESD Protection=Yes, Height=1.25mm, Impedance=70R, Lead Free="Lead Free", Length=2.84mm, Manufacturer Part Number=MMSZ24T1G, Max Reverse Leakage Current=50nA, Number of Pins=2, Packaging="Tape and Reel", Power Dissipation=500mW, Power Rating=500mW, Pricing 1="1=0.22650, 10=0.18600, 25=0.17690, 100=0.10080, 250=0.09980, 500=0.07220, 1000=0.05330, 3000=0.04250, 6000=0.03220, 15000=0.02660, 30000=0.02630, 75000=0.02610 (USD)", Radiation Hardening=No, REACH SVHC="No SVHC", RoHS=Yes, Stock 1=86820, Supplier 1="Arrow Electronics", Supplier Part Number 1=MMSZ24T1G, Voltage Tolerance=5%, Width=1.8mm, Working Voltage=24V, Zener Voltage=24V
D2: library part 1N4448X-TP, "1N4448X Series 4 A 75 V 150 mW Surface Mount Switching Diode - SOD-523", Average Rectified Current=250mA, Capacitance=4pF, Current Rating=150mA, Forward Current=500mA, Forward Voltage=1.25V, Manufacturer=MCC, Max Operating Temperature=150°C, Max Repetitive Reverse Voltage (Vrrm)=75V, Max Reverse Leakage Current=2.5uA, Max Surge Current=4A, Min Operating Temperature=-65°C, Package Quantity=1, Power Dissipation=150mW, Category="Rectifier Diodes", ComponentLink1Description=https://datasheet.ciiva.com/916/1n4448xsod-523-916912.pdf?src-supplier=Digi-Key, ComponentLink1URL=https://datasheet.ciiva.com/916/1n4448xsod-523-916912.pdf?src-supplier=Digi-Key, ComponentLink2Description=https://datasheet.ciiva.com/16836/1n4448xsod-523-16836341.pdf?src-supplier=Future+Electronics, ComponentLink2URL=https://datasheet.ciiva.com/16836/1n4448xsod-523-16836341.pdf?src-supplier=Future+Electronics, Element Configuration=Single, Lead Free="Lead Free", Manufacturer Part Number=1N4448X-TP, Max Reverse Voltage (DC)=75V, Mount="Surface Mount", Number of Pins=2, Output Current=500mA, Packaging="Tape and Reel", Peak Non-Repetitive Surge Current=4A, Polarity=Standard, Pricing 1="8000=0.03630, 24000=0.03380, 48000=0.02910 (USD)", Recovery Time=4ns, Reverse Recovery Time=4ns, RoHS=Yes, Stock 1=216000, Supplier 1="Arrow Electronics", Supplier Part Number 1=1N4448X-TP, Voltage Rating (DC)=75V
D3: library part PESD18VF1BLYL, "TVS DIODE 18VWM 17VC SOD882", Manufacturer=Nexperia, Category="ESD and Circuit Protection ICs", ComponentLink1Description=http://www.farnell.com/datasheets/1738914.pdf?src-supplier=Farnell, ComponentLink1URL=http://www.farnell.com/datasheets/1738914.pdf?src-supplier=Farnell, ComponentLink2Description=http://www.farnell.com/datasheets/1738914.pdf?src-supplier=Newark, ComponentLink2URL=http://www.farnell.com/datasheets/1738914.pdf?src-supplier=Newark, ComponentLink3Description=https://assets.nexperia.com/documents/data-sheet/PESD18VF1BL.pdf?src-supplier=Digi-Key, ComponentLink3URL=https://assets.nexperia.com/documents/data-sheet/PESD18VF1BL.pdf?src-supplier=Digi-Key, Manufacturer Part Number=PESD18VF1BLYL, Pricing 1="1=0.35670, 10=0.07470, 25=0.07380, 100=0.07320, 250=0.06160, 500=0.06100, 1000=0.05850, 3000=0.05790, 6000=0.05730 (USD)", RoHS=Yes, RoHS Compliant=Yes, Stock 1=6792, Supplier 1="Arrow Electronics", Supplier Part Number 1=PESD18VF1BLYL
DCJack1: library part KLDX-0202-B, "Conn Power PIN 2 POS Solder RA Thru-Hole 3 Terminal 1 Port", Color=Black, Current Rating=3.5A, Flammability Rating="UL94 V-0", Insulation Resistance=100MR, Manufacturer=Kycon, Max Operating Temperature=85°C, Min Operating Temperature=-25°C, Package Quantity=500, Supplier Part Number 1=2092-KLDX-0202-B-ND, Voltage Rating=24V, Category="Power Connectors", ComponentLink1Description=https://datasheet.ciiva.com/4561/kldx-0202-x-184473-4561491.pdf?src-supplier=Mouser, ComponentLink1URL=https://datasheet.ciiva.com/4561/kldx-0202-x-184473-4561491.pdf?src-supplier=Mouser, Connector Type=Power, Contact Gender=Female, Contact Material=Brass, Contact Plating=Tin, Gender=Female, Housing Material=PBT, Manufacturer Part Number=KLDX-0202-B, Mount="Through Hole", Number of Contacts=2, Orientation="Right Angle", Packaging=Bag, Pricing 1="1=0.74000, 10=0.62400, 25=0.59800, 50=0.58540, 100=0.55990, 250=0.50904, 500=0.45814, 1000=0.40723, 2500=0.36906 (USD)", RoHS=Yes, Stock 1=90692, Supplier 1=Digi-Key, Termination=Solder, Voltage Rating (DC)=24V
ICSP1: "Conn Unshrouded Header M 6 POS 2.54mm Solder ST Thru-Hole", Manufacturer="Fischer Elektronik", Max Current Rating=3A, Max Operating Temperature=163°C, Max Voltage Rating (AC)=250V, Min Operating Temperature=-40°C, Category="Headers and Wire Housings", ComponentLink1Description=https://datasheet.ciiva.com/26853/getdatasheetpartid-646250-26853533.pdf?src-supplier=Verical, ComponentLink1URL=https://datasheet.ciiva.com/26853/getdatasheetpartid-646250-26853533.pdf?src-supplier=Verical, Contact Material=Bronze, Contact Plating=Gold, Depth=5mm, Gender=Male, Housing Material=Polyamide, Length=15.24mm, Manufacturer Part Number="SL 22 112 06 G", Number of Rows=2, Orientation=Straight, Pitch=2.54mm, Pricing 1="1=0.53140, 25=0.53130, 50=0.53120, 100=0.53110 (USD)", RoHS=Yes, Stock 1=6120, Supplier 1="Arrow Electronics", Supplier Part Number 1="SL 22 112 06 G", Termination=Solder
MTH1 MTH2 MTH3 MTH4: library part MTH_6mmOD_3mmID, "Mounting Hole 6mm outer 3mm inner drill"
OLED1: "Header, 4-Pin", LatestRevisionDate=17-Jul-2002, LatestRevisionNote="Re-released for DXP Platform.", Publisher="Altium Limited"
Q1: library part AOD442, "Trans MOSFET N-CH 60V 37A 3-Pin(2+Tab) DPAK", Case/Package=DPAK, Continuous Drain Current (ID)=37A, Drain to Source Voltage (Vdss)=60V, Gate to Source Voltage (Vgs)=20V, Input Capacitance=2.3nF, Manufacturer="Alpha & Omega Semiconductor", Max Operating Temperature=175°C, Max Power Dissipation=2.1W, Min Operating Temperature=-55°C, Power Dissipation=60W, Supplier Part Number 1=C87617, Category=MOSFETs, ComponentLink1Description=https://datasheet.ciiva.com/6384/aod442-6384657.pdf?src-supplier=Digi-Key, ComponentLink1URL=https://datasheet.ciiva.com/6384/aod442-6384657.pdf?src-supplier=Digi-Key, ComponentLink2Description=https://datasheet.ciiva.com/6384/aod442-6384651.pdf?src-supplier=Digi-Key, ComponentLink2URL=https://datasheet.ciiva.com/6384/aod442-6384651.pdf?src-supplier=Digi-Key, ComponentLink3Description=https://datasheet.ciiva.com/6384/aod442-6384654.pdf?src-supplier=Digi-Key, ComponentLink3URL=https://datasheet.ciiva.com/6384/aod442-6384654.pdf?src-supplier=Digi-Key, Lead Free="Lead Free", Manufacturer Part Number=AOD442, Mount="Surface Mount", Number of Elements=1, Number of Pins=3, Packaging="Tape and Reel", Pricing 1="1=0.66730, 10=0.54640, 30=0.48690, 100=0.42740, 500=0.39140, 1000=0.37330 (USD)", Radiation Hardening=No, Rds On Max=20mR, RoHS=Yes, Stock 1=14654, Supplier 1=LCSC
R1 R2 R3 R4: library part RT0603DRE0710KL, "Res Thin Film 0603 10K Ohm 0.5% 0.1W(1/10W) ±50ppm/°C Pad SMD T/R", Case Code (Imperial)=0603, Case Code (Metric)=1608, Manufacturer=Yageo, Max Operating Temperature=125°C, Max Power Dissipation=100mW, Min Operating Temperature=-55°C, Package Quantity=5000, Resistance=10k, Resistor Type="Thin Film", Temperature Coefficient=50ppm/°C, Tolerance=0.5%, Voltage Rating=75V, Voltage Rating (DC)=50V, Case/Package=0603, Category="Chip SMD Resistors", ComponentLink1Description=https://datasheet.ciiva.com/2565/pyu-rt-1-to-0-05-rohs-l-5-2565939.pdf?src-supplier=Digi-Key, ComponentLink1URL=https://datasheet.ciiva.com/2565/pyu-rt-1-to-0-05-rohs-l-5-2565939.pdf?src-supplier=Digi-Key, Construction=Rectangular, Depth=0.8mm, Features="Moisture Resistant", Height=0.022inch, Lead Free="Lead Free", Length=0.063inch, Manufacturer Part Number=RT0603DRE0710KL, Military Standard=Not, Number of Terminations=2, Packaging="Tape and Reel", Power Rating=100mW, Pricing 1="1=0.09190, 10=0.07850, 25=0.04030, 100=0.02970, 250=0.01780, 500=0.01770, 1000=0.01580, 3000=0.01220 (USD)", RoHS=Yes, RoHS Compliant=Yes, Series=RT, Size Code=0603, Stock 1=4505, Supplier 1="Arrow Electronics", Supplier Part Number 1=RT0603DRE0710KL, Termination=SMD/SMT, Width=0.031inch
R5: library part RC0805FR-073KL, "Res Thick Film 0805 3K Ohm 1% 0.125W(1/8W) ±100ppm/C Pad SMD T/R", Case Code (Imperial)=0805, Case Code (Metric)=2012, Manufacturer=Yageo, Max Operating Temperature=155°C, Max Power Dissipation=125mW, Min Operating Temperature=-55°C, Package Quantity=1, Resistance=3k, Resistor Type="Thick Film", Temperature Coefficient=100ppm/°C, Tolerance=1%, Voltage Rating=150V, Case/Package=0805, Category="Chip SMD Resistors", ComponentLink1Description=https://datasheet.ciiva.com/2457/pyu-r-int-thick-7-2457135.pdf?src-supplier=Digi-Key, ComponentLink1URL=https://datasheet.ciiva.com/2457/pyu-r-int-thick-7-2457135.pdf?src-supplier=Digi-Key, ComponentLink2Description=https://datasheet.ciiva.com/2457/pyu-r-int-thick-7-2457136.pdf?src-supplier=Digi-Key, ComponentLink2URL=https://datasheet.ciiva.com/2457/pyu-r-int-thick-7-2457136.pdf?src-supplier=Digi-Key, ComponentLink3Description=https://datasheet.ciiva.com/2457/pyu-r-int-thick-7-2457134.pdf?src-supplier=Digi-Key, ComponentLink3URL=https://datasheet.ciiva.com/2457/pyu-r-int-thick-7-2457134.pdf?src-supplier=Digi-Key, ComponentLink4Description=https://datasheet.ciiva.com/5558/rc0805-5558124.pdf?src-supplier=Mouser, ComponentLink4URL=https://datasheet.ciiva.com/5558/rc0805-5558124.pdf?src-supplier=Mouser, ComponentLink5Description=https://datasheet.ciiva.com/17043/rc0805-17043750.pdf?src-supplier=Future+Electronics, ComponentLink5URL=https://datasheet.ciiva.com/17043/rc0805-17043750.pdf?src-supplier=Future+Electronics, Construction=Rectangular, Depth=1.25mm, Features="Moisture Resistant", Height=0.024inch, Lead Free="Lead Free", Length=2mm, Manufacturer Part Number=RC0805FR-073KL, Military Standard=Not, Mount="Surface Mount", Number of Terminations=2, Packaging="Tape and Reel", Power Rating=125mW, Pricing 1="5000=0.00470 (USD)", RoHS=Yes, RoHS Compliant=Yes, Series=RC, Size Code=0805, Stock 1=75000, Supplier 1="Arrow Electronics", Supplier Part Number 1=RC0805FR-073KL, Termination=SMD/SMT, Voltage Rating (DC)=150V, Width=0.049inch
R6: library part CR0805-FX-1001ELF, "125mW ±100ppm/℃ ±1% 1kΩ 0805 Chip Resistor - Surface Mount ROHS", Case Code (Imperial)=0805, Case Code (Metric)=2012, Manufacturer=Bourns, Max Operating Temperature=155°C, Max Power Dissipation=125mW, Min Operating Temperature=-55°C, Package Quantity=1, Resistance=1k, Resistance Tolerance=1%, Resistor Type="Thick Film", Temperature Coefficient=100ppm/°C, Voltage Rating=150V, Case/Package=0805, Category="Chip SMD Resistors", ComponentLink1Description=https://datasheet.ciiva.com/11810/0900766b80fcdb72-11810305.pdf?src-supplier=RSComponents, ComponentLink1URL=https://datasheet.ciiva.com/11810/0900766b80fcdb72-11810305.pdf?src-supplier=RSComponents, ComponentLink2Description=https://datasheet.ciiva.com/27049/775383-27049976.pdf?src-supplier=Jameco, ComponentLink2URL=https://datasheet.ciiva.com/27049/775383-27049976.pdf?src-supplier=Jameco, ComponentLink3Description=https://datasheet.ciiva.com/16722/70154685-16722677.pdf?src-supplier=Allied+Electronics, ComponentLink3URL=https://datasheet.ciiva.com/16722/70154685-16722677.pdf?src-supplier=Allied+Electronics, ComponentLink4Description=https://datasheet.ciiva.com/9123/chpreztr-9123643.pdf?src-supplier=Avnet, ComponentLink4URL=https://datasheet.ciiva.com/9123/chpreztr-9123643.pdf?src-supplier=Avnet, ComponentLink5Description=https://datasheet.ciiva.com/6547/chpreztr-6547421.pdf?src-supplier=Digi-Key, ComponentLink5URL=https://datasheet.ciiva.com/6547/chpreztr-6547421.pdf?src-supplier=Digi-Key, ComponentLink6Description=https://datasheet.ciiva.com/30129/159chpreztr-30129981.pdf?src-supplier=Onlinecomponents.com, ComponentLink6URL=https://datasheet.ciiva.com/30129/159chpreztr-30129981.pdf?src-supplier=Onlinecomponents.com, ComponentLink7Description=https://datasheet.ciiva.com/6547/chpreztr-6547422.pdf?src-supplier=Digi-Key, ComponentLink7URL=https://datasheet.ciiva.com/6547/chpreztr-6547422.pdf?src-supplier=Digi-Key, ComponentLink8Description=https://datasheet.ciiva.com/46394/691949-46394380.pdf?src-supplier=Element14, ComponentLink8URL=https://datasheet.ciiva.com/46394/691949-46394380.pdf?src-supplier=Element14, ComponentLink9Description=https://datasheet.ciiva.com/7986/1856384-7986222.pdf?src-supplier=Element14, ComponentLink9URL=https://datasheet.ciiva.com/7986/1856384-7986222.pdf?src-supplier=Element14, ComponentLink10Description=https://datasheet.ciiva.com/6547/chpreztr-6547423.pdf?src-supplier=Digi-Key, ComponentLink10URL=https://datasheet.ciiva.com/6547/chpreztr-6547423.pdf?src-supplier=Digi-Key, ComponentLink11Description=https://datasheet.ciiva.com/48692/001055506-da-01-en-smd-wid-cr0805-fx-1001elf-1k-ohm-1-8w-48692106.pdf?src-supplier=Conrad, ComponentLink11URL=https://datasheet.ciiva.com/48692/001055506-da-01-en-smd-wid-cr0805-fx-1001elf-1k-ohm-1-8w-48692106.pdf?src-supplier=Conrad, Contact Plating=Tin, Depth=1.25mm, Features="Moisture Resistant", Height=0.5mm, Length=2mm, Manufacturer Part Number=CR0805-FX-1001ELF, Mount="Surface Mount", Number of Pins=2, Number of Terminations=2, Packaging="Tape and Reel", Power Rating=125mW, Pricing 1="100000=0.00430 (USD)", Radiation Hardening=No, REACH SVHC="No SVHC", RoHS=Yes, RoHS Compliant=Yes, Series=CR0805, Stock 1=100000, Supplier 1="Arrow Electronics", Supplier Part Number 1=CR0805-FX-1001ELF, Technology="THICK FILM", Termination=SMD/SMT, Thickness=508um, Tolerance=1%, Voltage Rating (DC)=150V, Width=1.25mm
S1 S2: "Switch", Manufacturer="C & K COMPONENTS", Manufacturer Part Number="PTS636 SP50 LFS", Arrow Price/Stock=https://www.arrow.com/en/products/pts636-sp50-lfs/ck, Datasheet Link=https://www.ckswitches.com/media/2779/pts636.pdf, Height=4.5mm, Supplier 1="Arrow Electronics", Supplier Part Number 1="PTS636 SP50 LFS"
U1: "2KB 16K@x16bit -40℃~+85℃ 1.8V~5.5V AVR 1@x8ch/10bit Internal oscillator included 20MHz 23 1KB TQFP-32_7x7x08P Microcontroller Units (MCUs/MPUs/SOCs) ROHS", Case/Package=TQFP, Manufacturer=Microchip, Supplier Part Number 1=C14877, Category=Microcontrollers, ComponentLink1Description=http://www.farnell.com/datasheets/2047852.pdf?src-supplier=Farnell, ComponentLink1URL=http://www.farnell.com/datasheets/2047852.pdf?src-supplier=Farnell, ComponentLink2Description=https://4donline.ihs.com/images/VipMasterIC/IC/ATML/ATML-S-A0002642585/ATML-S-A0002642585-1.pdf?hkey=6D3A4C79FDBF58556ACFDE234799DDF0&src-supplier=Farnell, ComponentLink2URL=https://4donline.ihs.com/images/VipMasterIC/IC/ATML/ATML-S-A0002642585/ATML-S-A0002642585-1.pdf?hkey=6D3A4C79FDBF58556ACFDE234799DDF0&src-supplier=Farnell, ComponentLink3Description=https://4donline.ihs.com/images/VipMasterIC/IC/ATML/ATML-S-A0002642585/ATML-S-A0002642585-1.pdf?src-supplier=Element14, ComponentLink3URL=https://4donline.ihs.com/images/VipMasterIC/IC/ATML/ATML-S-A0002642585/ATML-S-A0002642585-1.pdf?src-supplier=Element14, ComponentLink4Description=http://www.farnell.com/datasheets/798182.pdf?src-supplier=Newark, ComponentLink4URL=http://www.farnell.com/datasheets/798182.pdf?src-supplier=Newark, ComponentLink5Description=http://www.microchip.com/mymicrochip/filehandler.aspx?ddocname=en589968&src-supplier=Digi-Key, ComponentLink5URL=http://www.microchip.com/mymicrochip/filehandler.aspx?ddocname=en589968&src-supplier=Digi-Key, Manufacturer Part Number=ATMEGA328P-AU, Pricing 1="1=4.54970, 10=4.01960, 30=3.74910, 100=3.38840, 500=3.25860, 1000=3.20270 (USD)", RoHS=Yes, RoHS Compliant=Yes, Stock 1=9922, Supplier 1=LCSC
U2: "1.8V-Capable, 10 uA Analog Output Temperature Sensor in SC70 and TO-92 3-TO-92 -50 to 150", Case/Package=TO-226-3, Manufacturer="Texas Instruments", Max Operating Temperature=150°C, Max Supply Voltage=5.5V, Min Operating Temperature=-50°C, Min Supply Voltage=1.8V, Category="Integrated Circuits (ICs)", ComponentLink1Description=http://components.arrow.com/part/dataview/66446727S843532N7713?src-supplier=Arrow+Electronics, ComponentLink1URL=http://components.arrow.com/part/dataview/66446727S843532N7713?src-supplier=Arrow+Electronics, ComponentLink2Description=http://www.ti.com/general/docs/lit/getliterature.tsp?genericPartNumber=LMT85&fileType=pdf&src-supplier=Farnell, ComponentLink2URL=http://www.ti.com/general/docs/lit/getliterature.tsp?genericPartNumber=LMT85&fileType=pdf&src-supplier=Farnell, ComponentLink3Description=http://www.farnell.com/datasheets/2001682.pdf?src-supplier=Element14, ComponentLink3URL=http://www.farnell.com/datasheets/2001682.pdf?src-supplier=Element14, ComponentLink4Description=http://www.ti.com/general/docs/suppproductinfo.tsp?distId=10&amp;gotoUrl=http%3A%2F%2Fwww.ti.com%2Flit%2Fgpn%2Flmt85&src-supplier=Digi-Key, ComponentLink4URL=http://www.ti.com/general/docs/suppproductinfo.tsp?distId=10&amp;gotoUrl=http%3A%2F%2Fwww.ti.com%2Flit%2Fgpn%2Flmt85&src-supplier=Digi-Key, ComponentLink5Description=http://www.ti.com/lit/gpn/lmt85?src-supplier=Mouser, ComponentLink5URL=http://www.ti.com/lit/gpn/lmt85?src-supplier=Mouser, ComponentLink6Description=http://www.ti.com/general/docs/lit/getliterature.tsp?genericPartNumber=LMT85-Q1&&fileType=pdf&src-supplier=Avnet, ComponentLink6URL=http://www.ti.com/general/docs/lit/getliterature.tsp?genericPartNumber=LMT85-Q1&&fileType=pdf&src-supplier=Avnet, Interface=Analog, Lead Free="Lead Free", Manufacturer Part Number=LMT85LP, Mount="Through Hole", Number of Pins=3, Output Type="Analog Voltage,Analog", Packaging=Bulk, Pricing 1="1=1.02040, 10=0.74280, 25=0.73520, 100=0.53290, 250=0.52760, 500=0.50920, 1000=0.49080 (USD)", REACH SVHC="No SVHC", RoHS=Yes, RoHS Compliant=Yes, Stock 1=1882, Supplier 1="Arrow Electronics", Supplier Part Number 1=LMT85LP
U3: "1A 70dB@(120Hz) 5mA 1.4V@1A -40℃~+125℃@(Tj) Fixed 5V~5V Positive 0.003%Vout 1 20V High-current SOT-223-3 Linear Voltage Regulators (LDO) ROHS", Manufacturer=WPMtek, Supplier Part Number 1=C2909825, Category=Uncategorized, Manufacturer Part Number=AMS1117-5.0, Pricing 1="5=0.07700, 50=0.06190, 150=0.05430, 500=0.04860, 2500=0.04410, 5000=0.04180 (USD)", RoHS=No, Stock 1=1560, Supplier 1=LCSC
XTAL1: library part ABM7-16.000MHZ-D2Y-T, "Crystal 16MHz ±20ppm (Tol) ±30ppm (Stability) 18pF FUND 50Ohm 2-Pin Mini-CSMD T/R", Case/Package=CSMD, ESR (Equivalent Series Resistance)=50R, Frequency=16MHz, Frequency Stability=30ppm, Frequency Tolerance=20ppm, Load Capacitance=18pF, Manufacturer=Abracon, Max Operating Temperature=85°C, Min Operating Temperature=-40°C, Operating Frequency="16 MHz", Package Quantity=1000, Resistor Type=Ceramic, Category=Crystals, ComponentLink1Description=https://datasheet.ciiva.com/15116/getdatasheetpartid-721624-15116835.pdf?src-supplier=Verical, ComponentLink1URL=https://datasheet.ciiva.com/15116/getdatasheetpartid-721624-15116835.pdf?src-supplier=Verical, ComponentLink2Description=https://datasheet.ciiva.com/5788/abm7-5788054.pdf?src-supplier=Farnell, ComponentLink2URL=https://datasheet.ciiva.com/5788/abm7-5788054.pdf?src-supplier=Farnell, ComponentLink3Description=https://datasheet.ciiva.com/7998/947971-7998600.pdf?src-supplier=Element14, ComponentLink3URL=https://datasheet.ciiva.com/7998/947971-7998600.pdf?src-supplier=Element14, ComponentLink4Description=https://datasheet.ciiva.com/22658/947971-22658293.pdf?src-supplier=Element14, ComponentLink4URL=https://datasheet.ciiva.com/22658/947971-22658293.pdf?src-supplier=Element14, ComponentLink5Description=https://datasheet.ciiva.com/46385/947971-46385243.pdf?src-supplier=Element14, ComponentLink5URL=https://datasheet.ciiva.com/46385/947971-46385243.pdf?src-supplier=Element14, ComponentLink6Description=https://datasheet.ciiva.com/18649/abm7-18649866.pdf?src-supplier=Digi-Key, ComponentLink6URL=https://datasheet.ciiva.com/18649/abm7-18649866.pdf?src-supplier=Digi-Key, ComponentLink7Description=https://datasheet.ciiva.com/18649/abm7-18649865.pdf?src-supplier=Digi-Key, ComponentLink7URL=https://datasheet.ciiva.com/18649/abm7-18649865.pdf?src-supplier=Digi-Key, ComponentLink8Description=https://datasheet.ciiva.com/18649/abm7-18649867.pdf?src-supplier=Digi-Key, ComponentLink8URL=https://datasheet.ciiva.com/18649/abm7-18649867.pdf?src-supplier=Digi-Key, ComponentLink9Description=https://datasheet.ciiva.com/16383/abm7-16383174.pdf?src-supplier=Future+Electronics, ComponentLink9URL=https://datasheet.ciiva.com/16383/abm7-16383174.pdf?src-supplier=Future+Electronics, ComponentLink10Description=https://datasheet.ciiva.com/26941/getdatasheetpartid-719818-26941724.pdf?src-supplier=Verical, ComponentLink10URL=https://datasheet.ciiva.com/26941/getdatasheetpartid-719818-26941724.pdf?src-supplier=Verical, Depth=3.5mm, Height=0.055inch, Lead Free="Lead Free", Length=6mm, Manufacturer Part Number=ABM7-16.000MHZ-D2Y-T, Mount="Surface Mount", Number of Pins=2, Packaging="Tape and Reel", Pricing 1="1=0.86850, 10=0.72440, 25=0.71710 (USD)", Radiation Hardening=No, REACH SVHC=Unknown, RoHS=Yes, Series=ABM7, Stock 1=40, Supplier 1="Arrow Electronics", Supplier Part Number 1=ABM7-16.000MHZ-D2Y-T, Termination=SMD/SMT, Tolerance=20ppm, Width=3.3mm

## Via types
v1: diameter 23.62, hole 11.81, Top Layer to Bottom Layer, tented both sides, 29 vias
v2: diameter 50, hole 28, Top Layer to Bottom Layer, tented both sides, 13 vias
v3: diameter 25, hole 15, Top Layer to Bottom Layer, tented both sides, 5 vias

## Nets (pads, with @x,y where several pads share a name; then routed paths per layer and width w, separated by ;. In a path a pad name is that pad's centre, name@x,y a point inside that pad or via, vN(x,y) a via of type N, cw(c..) or ccw(c..) an arc to the next point about the centre after c; other vN are vias at no path point)
+5V: C2.2 C3.1 C5.1 C6.1 C7.2 ICSP1.4 OLED1.3 R1.2 S1.2 S2.2 U1.4@2553.32,3264.22 U1.6@2508.78,3219.68 U1.18@2709.22,2974.7 U2.1 U3.2@1670.47,3177.17 U3.4@1904.33,3177.17 | length 5048.9
  Top Layer w16: 2493.05,3397.45 2515.83,3374.67 ; U1.6@2508.78,3219.68 2476.49,3251.97 2476.49,3275.71 C2.2 ; U1.4@2553.32,3264.22 2513.96,3303.59 2507.16,3303.59 C2.2 ; U1.18@2709.22,2974.7 2710.43,2974.7 2737.03,2948.1 2779.96,2948.1 C3.1 2782.37,2946.71 2795.28,2933.81 2834.65,2933.81 2972.44,3071.6 2972.44,3279.31 ; v2(2909.45,3284.2) 2913.75,3279.9 3094.12,3279.9 S1.2 S2.2 ; U2.1 3586.38,2557.52 3567.87,2576.03 C5.1 3567.87,2697.51 3647.24,2776.88 ICSP1.4 3711.02,3033.86 3727.28,3050.11 3727.28,3304.22 3712.6,3318.9 3460.63,3318.9 3362.2,3417.32 v2(2814.96,3417.32) 2812.49,3417.32 2769.68,3374.51 R1.2 2763.28,3374.51 2729.48,3408.32 2555.49,3408.32 2488.19,3341.02 2488.19,3325.16 2505.77,3307.58 C2.2
  Top Layer w35: OLED1.3 1541.94,3159.84 1559.27,3177.17 1670.47,3177.17 U3.4@1904.33,3177.17 ; C7.2 1904.92,2984.84 1904.92,3176.57 U3.4@1904.33,3177.17 ; 2493.05,3397.45 2476.38,3414.12 2106.3,3414.12 2078,3385.83 C6.1 1899.02,3380.51 1899.02,3182.48 U3.4@1904.33,3177.17
  Bottom Layer w16: v2(2814.96,3417.32) 2902.94,3329.34 2902.94,3290.71 v2(2909.45,3284.2)
DNSW: C12.2 R4.2 S2.1 U1.10@2486.51,3086.05 | length 1460.4
  Top Layer w16: U1.10@2486.51,3086.05 2452.76,3052.3 2452.76,3023.62 C12.2 2482.14,2991.63 2425.2,2934.68 2425.2,2846.46 2492.13,2779.53 3059.06,2779.53 3153.54,2874.02 3153.54,2925.2 3248.03,3019.68 3314.96,3019.68 S2.1 3319.39,3023.13 3319.39,2906 R4.2
GND: C1.1 C2.1 C3.2 C4.2 C5.2 C6.2 C7.1 C8.2 C9.1 C11.1 C12.1 C13.2 C14.1 C15.1 C16.2 C17.1 C18.1 C19.1 D3.2 DCJack1.P2 DCJack1.P3 ICSP1.5 MTH3.1 MTH4.1 OLED1.4 Q1.2 R2.1 R3.1 R4.1 R6.1 U1.3@2575.59,3286.49 U1.5@2531.05,3241.95 U1.21@2776.03,3041.51 U2.3 U3.1@1670.47,3267.72 | length 2032
  Top Layer w10: v3(905.51,3110.97) 959.89,3110.97 C17.1 ; v3(905.51,3240.89) 906.86,3239.54 955.34,3239.54 D3.2 ; v3(1059.06,3181.84) R6.1 ; v3(1263.78,3311.76) 1337.85,3311.76 C8.2 1339.32,3311.76 v3(1417.32,3311.76) ; C19.1 C18.1 ; v1(2412.28,2984.91) 2412.83,2985.46 2412.83,3011.26 C11.1 ; U1.21@2776.03,3041.51 2807.8,3009.74 2807.8,2975.94 C3.2 2811.06,2974.55 2829.42,2992.91 v1(2831.28,2992.91) ; C4.2 2914.69,3081.33 v1(2943.28,3109.91) ; v1(3042.28,2866.91) R3.1 ; v1(3256.28,2868.91) 3258.88,2871.52 3258.88,2901.6 R4.1 ; v1(3393.28,2870.91) 3393.49,2871.12 3393.49,2905.3 C15.1 ; v1(3448.82,3161.42) C1.1 C1.1@3449.28,3204.26
  Top Layer w16: R2.1 1032.48,2810.04 1078.74,2763.78 1078.74,2717.92 Q1.2 ; U3.1@1670.47,3267.72 1671.28,3266.91 v1(1671.28,3223.91) ; C9.1 1678.37,2916.12 1725.07,2916.12 v1(1726.28,2914.91) ; C6.2 1807.18,3385.73 1807.18,3321 v1(1807.28,3320.91) ; v1(1841.28,2931.91) 1841.9,2932.53 1841.9,2983.63 C7.1 ; v1(2473.28,2937.91) 2475.34,2937.91 2494.65,2957.22 2498.2,2957.22 2507.38,2966.4 C12.1 ; U1.5@2531.05,3241.95 2566.82,3206.19 2566.82,3194.37 v1(2568.28,3192.91) ; C2.1 2535,3331.42 2535,3327.09 2575.59,3286.49 2575.59,3285.28 2591.95,3268.92 2591.95,3267.23 v1(2617.28,3241.91) ; v1(2546.28,2831.91) 2546.76,2832.39 2546.76,2861.72 C13.2 ; C14.1 2720.75,2853.74 2740.28,2834.22 v1(2740.28,2833.91) ; C5.2 3505.08,2643.58 3505.08,2686.71 v1(3505.28,2686.91)
  Top Layer w50: C16.2 261.28,3123.87 DCJack1.P3 507.79,3133.72 541.84,3167.77 614.84,3167.77 690.94,3243.87 DCJack1.P2
  other v1: 939.28,2654.91 987.28,2654.91 960.63,2681.1 940.94,2708.66 984.28,2707.91 960.63,2732.28 940.94,2763.78 984.25,2763.78 1988.28,3119.91 1988.28,3152.24 1988.28,3184.58 1988.28,3216.91
MISO: C14.2 ICSP1.1 U1.16@2620.14,2952.43 | length 1111.4
  Top Layer w10: C14.2 2694.31,2883.28 2875.41,2883.28 3066.93,3074.8 3128.45,3074.8 3136.32,3066.93 v2(3208.66,3066.93)
  Top Layer w16: U1.16@2620.14,2952.43 2620.65,2952.94 2621.86,2952.94 C14.2
  Bottom Layer w10: v2(3208.66,3066.93) 3208.66,3070.87 3371.65,3233.86 ICSP1.1
Mos_Drain: C10.1 C10.2 C16.1 C17.2 D1.A D1.K D2.A D3.1 DCJack1.P1 Q1.1 | length 103981.3
  Top Layer w10: DCJack1.P1 952.76,3007.87 1023.62,3078.74 C17.2 ; D3.1 956.69,3188.98 968.5,3177.17 1003.94,3177.17 1023.62,3157.48 C17.2 ; C10.2 1559.06,2921.26 1511.81,2968.5 1480.31,2968.5 1460.63,2988.19 1460.63,3062.99 1454.13,3069.49 1280.07,3069.49 1274.21,3063.63 D1.K 1153.54,3019.68 1114.17,3059.05 1114.17,3108.27 D2.A C17.2
  Top Layer w35: Q1.1 1402.95,2871.77 D1.A ; Q1.1@1342.2,2803.15 C10.1